# EAGLE board lights_switch_one (EAGLE 7.5.0)
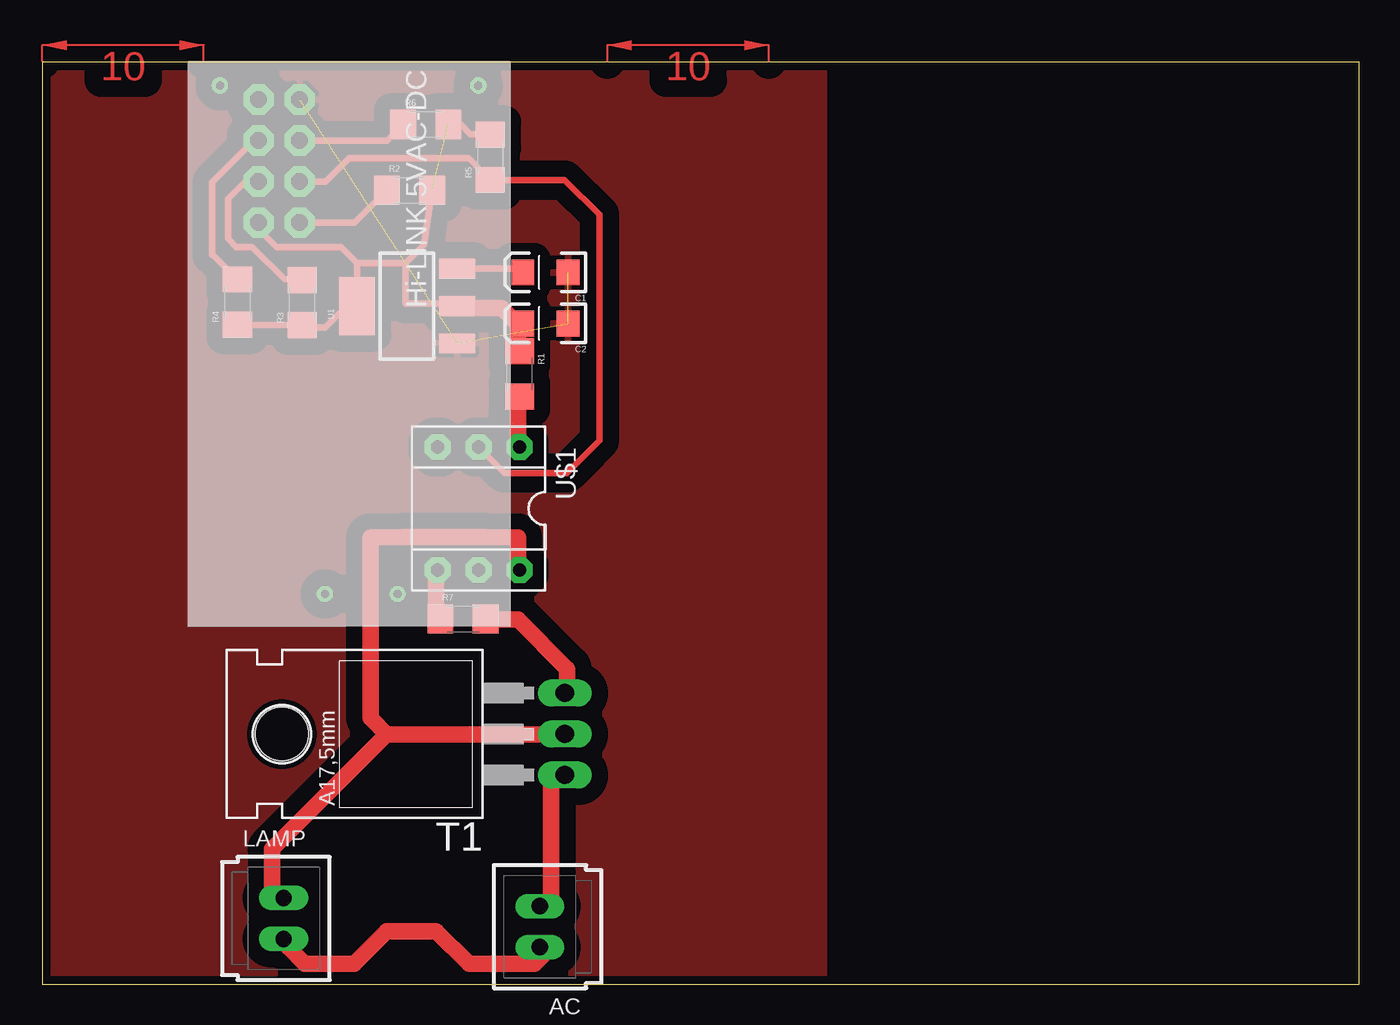
[diagram p0: board, top side]
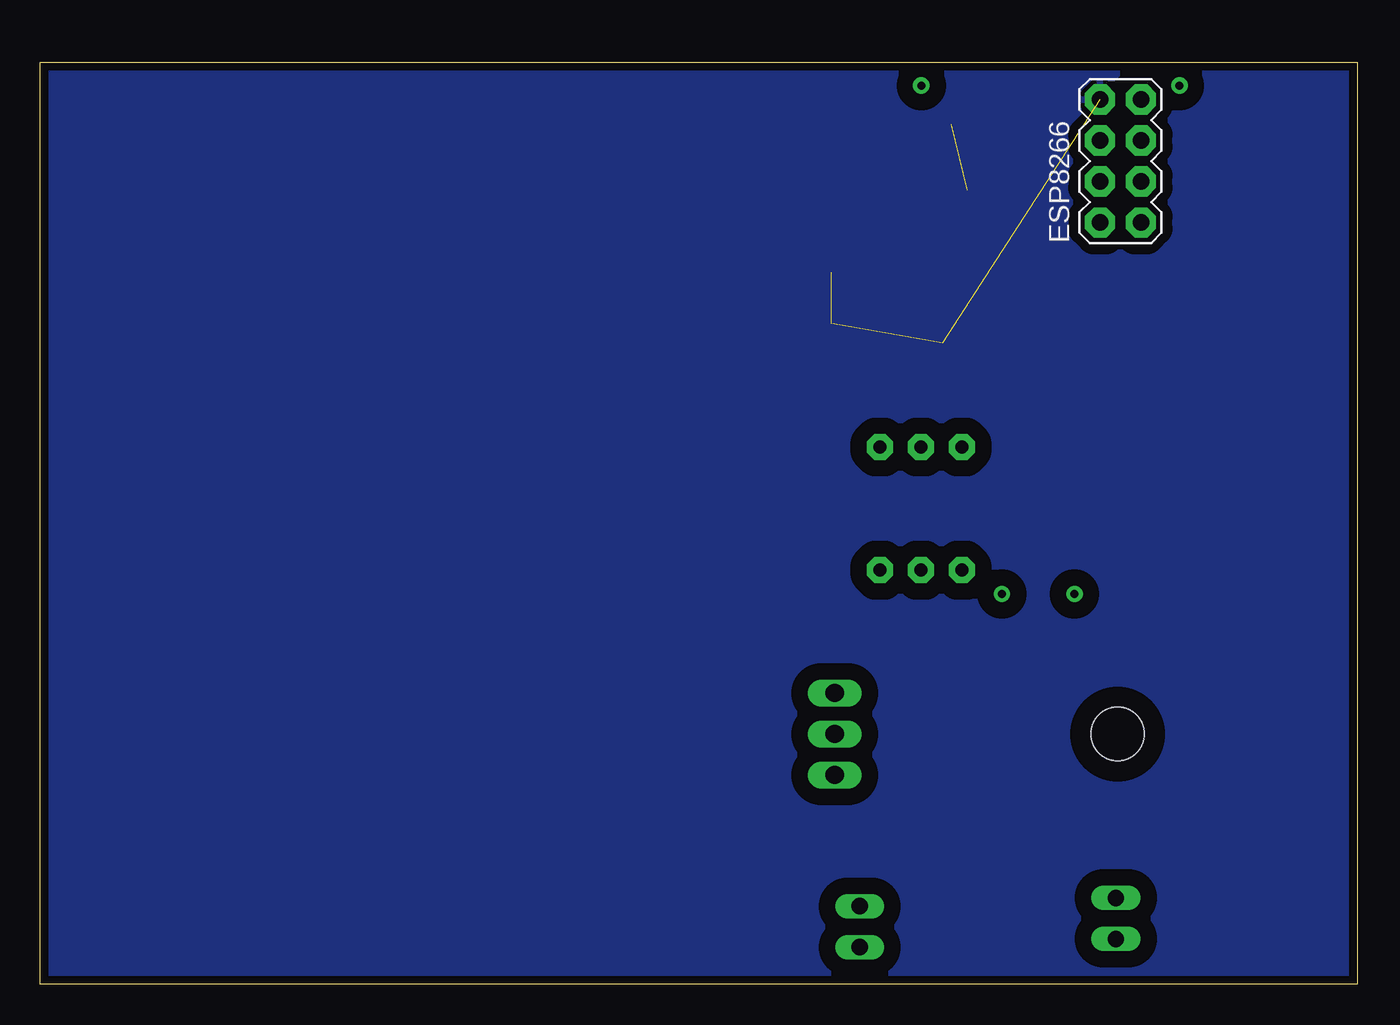
[diagram p1: board, bottom side, seen from below]

Size 81.57 x 57.14 mm. Coordinates in mm from the lower left corner, seen from the top.
Outline: 0,0 81.57,0 81.57,57.14 0,57.14 0,0
Copper layers (1*16): Top 0.035mm / dielectric 1.5mm / Bottom 0.035mm
Design rules "default *": minimum track width 20mil, minimum drill 24mil, track to track 20mil, track to pad 20mil, pad to pad 20mil, via to via 20mil, smd to smd 20mil, copper to edge 20mil, drill to drill 20mil, minimum pad ring 10mil, minimum via ring 8mil, stop-mask expansion 4mil, vias tented up to drill 0mil, thermal gap 10mil
Net classes: 0 default: width 0.508 mm, clearance 1.016 mm

## Footprints (pad centres in the part's own frame; a part is rotated, then mirrored left to right if it is on the bottom)
70543-02 = drill 1.016 long: 1 -1.27,0; 2 1.27,0
EIA3216 = smd 1.4 x 1.6: A 1.4,0; C -1.4,0
AC5V = drill 0.5: 5V_GND 1.5,18; 5V_VCC 1.5,2; AC1 33,13; AC2 33,8.5
2X4 = drill 1.016 pad 1.88 octagon: 1 -3.81,-1.27; 2 -3.81,1.27; 3 -1.27,-1.27; 4 -1.27,1.27; 5 1.27,-1.27; 6 1.27,1.27; 7 3.81,-1.27; 8 3.81,1.27
1206 = smd 1.6 x 1.8: 1 -1.4,0; 2 1.4,0
TO220AB = drill 1.118 long: 1 -2.54,-6.35; 2 0,-6.35; 3 2.54,-6.35 | hole 3.302: 0,11.176
SOT223 = smd 1.219 x 2.235: 1 -2.311,-3.099; 2 0,-3.099; 3 2.311,-3.099 | smd 3.6 x 2.2: 4 0,3.099
DIL06 = drill 0.813 pad 1.6 octagon: 1 -3.51,-3.81; 2 -0.97,-3.81; 3 1.57,-3.81; 4 1.57,3.81; 5 -0.97,3.81; 6 -3.51,3.81

## Placement (x,y rotation side)
AC  C-GRID-02-70543  [70543-02]  30.82,3.58 90 top
C1  [EIA3216]  31.16,44.11 180 top
C2  [EIA3216]  31.16,40.95 180 top
E$1  [AC5V]  9,57.19 270 top
ESP8266  [2X4]  14.66,51.01 90 bottom
LAMP  C-GRID-02-70543  [70543-02]  14.94,4.08 270 top
R1  [1206]  29.55,37.83 270 top
R2  [1206]  22.74,49.2 0 top
R3  [1206]  16.08,42.24 90 top
R4  [1206]  12.08,42.28 90 top
R5  [1206]  27.74,51.24 90 top
R6  [1206]  23.74,53.28 0 top
R7  [1206]  26.05,22.63 0 top
T1  BT136  [TO220AB]  26.01,15.51 90 top
U1  [SOT223]  22.58,42.03 90 top
U$1  MOC3031-M  [DIL06]  26.05,29.48 180 top

## Library data of the parts
AC LAMP = con-molex; OC_FARNELL: unknown; OC_NEWARK: unknown
C1 C2 = SparkFun-Capacitors
E$1 = myblog_library
ESP8266 = SparkFun-Connectors
R1-R7 = SparkFun-Resistors
T1 = triac
U1 = SparkFun-PowerIC; PROD_ID: VREG-08170
U$1 = SparkFun-DiscreteSemi

## Nets
GND: C1.C C2.C ESP8266.8 U1.1
N$2: ESP8266.3 R3.2
N$3: ESP8266.5 R4.2
N$4: ESP8266.2 R2.1
N$5: ESP8266.4 R5.1 U$1.2
N$6: ESP8266.6 R6.1
N$7: R1.2 U$1.1
N$8: R7.1 U$1.4
N$9: R7.2 T1.3
N$10: AC.2 T1.1
N$11: AC.1 LAMP.2
N$12: LAMP.1 T1.2 U$1.6
N$15: C2.A ESP8266.1 R1.1 R2.2 R3.1 R4.1 R5.2 R6.2 U1.2 U1.4
VCC: C1.A U1.3

## Tracks (layer width: path | path; a pad name or v marks a point on that pad's centre or on a via)
GND  (3 unrouted)
  pour Bottom: -2.54,84.78 105.41,84.78 105.41,-4.12 -2.54,-4.12
  pour Top: -5.08,66.01 48.41,66.51 48.41,-7.93 -5.08,-7.93
N$1
  pour Top: 35,57.19 35,-0.31 45,-0.31 45,57.19
  pour Top: 0,57.19 0,-0.31 11,-0.31 10,57.19
N$2
  Top 0.406: ESP8266.3 12.55,49.74 11.5,48.69 11.5,46.19 12,45.69 13,45.69 15,43.69 16.03,43.69 R3.2
N$3
  Top 0.406: ESP8266.5 13.09,52.28 10.5,49.69 10.5,45.19 10.57,45.19 R4.2 12.57,43.69 12,43.69
N$4
  Top 0.406: ESP8266.2 19.34,47.2 R2.1
N$5
  Top 0.406: U$1.2 28.62,31.69 32.5,31.69 34.5,33.69 34.5,47.69 32.35,49.84 R5.1 26.39,51.19 19,51.19 17.55,49.74 ESP8266.4
N$6
  Top 0.406: ESP8266.6 21.34,52.28 R6.1
N$7
  Top 1.016: R1.2 29.46,35.81 29.46,33.78 U$1.1
N$8
  Top 1.016: R7.1 24.38,22.61 24.38,25.65 U$1.4
N$9
  Top 1.016: R7.2 27.43,22.61 29.46,22.61 32.51,19.56 32.51,18.54 T1.3
N$10
  Top 1.016: AC.2 31.5,5.33 31.5,12.45 T1.1
N$11
  Top 1.016: LAMP.2 15.24,2.29 16.26,1.27 19.3,1.27 21.34,3.3 24.38,3.3 26.42,1.27 30.48,1.27 31.5,2.29 AC.1
N$12
  Top 1.016: 21.34,15.49 14.22,8.38 14.22,5.33 LAMP.1 | 21.34,15.49 31.5,15.49 T1.2 | 21.34,15.49 20.32,16.51 20.32,27.69 22.35,27.72 27.43,27.72 29.46,27.69 29.46,25.65 U$1.6
N$15  (1 unrouted)
  Top 0.406: ESP8266.1 13.39,46.8 14.5,45.69 18.5,45.69 19.5,44.69 | 19.5,44.69 19.5,42.05 U1.4 18.84,42.03 17.5,40.69 16.23,40.69 R3.1 12.12,40.84 R4.1 | R2.2 23.64,45.83 22.5,44.69 | 22.5,44.69 22.5,42.19 25.52,42.19 U1.2 | 22.5,44.69 19.5,44.69 | R6.2 25.91,53.28 26.5,52.69 27.69,52.69 R5.2
  Top 1.016: 29.46,40.89 29.46,39.88 R1.1 | 29.46,40.89 28.45,41.91 26.42,41.91 U1.2 | 29.46,40.89 C2.A
VCC
  Top 0.406: U1.3 29.53,44.34 C1.A
(copper drawn outside any net)
  shapes: Top area x2